# Altium PCB SIM_4G_EC200S.PcbDoc
Units mm, origin at the board's own origin, x right, y up, seen from the top; angles counter-clockwise.
Board outline 50 x 50 mm, 2 copper layers (Top Layer, Bottom Layer); 41 components, 29 nets, 241 pads, 9 vias.
Unrouted connection lines stored in the file: 1.
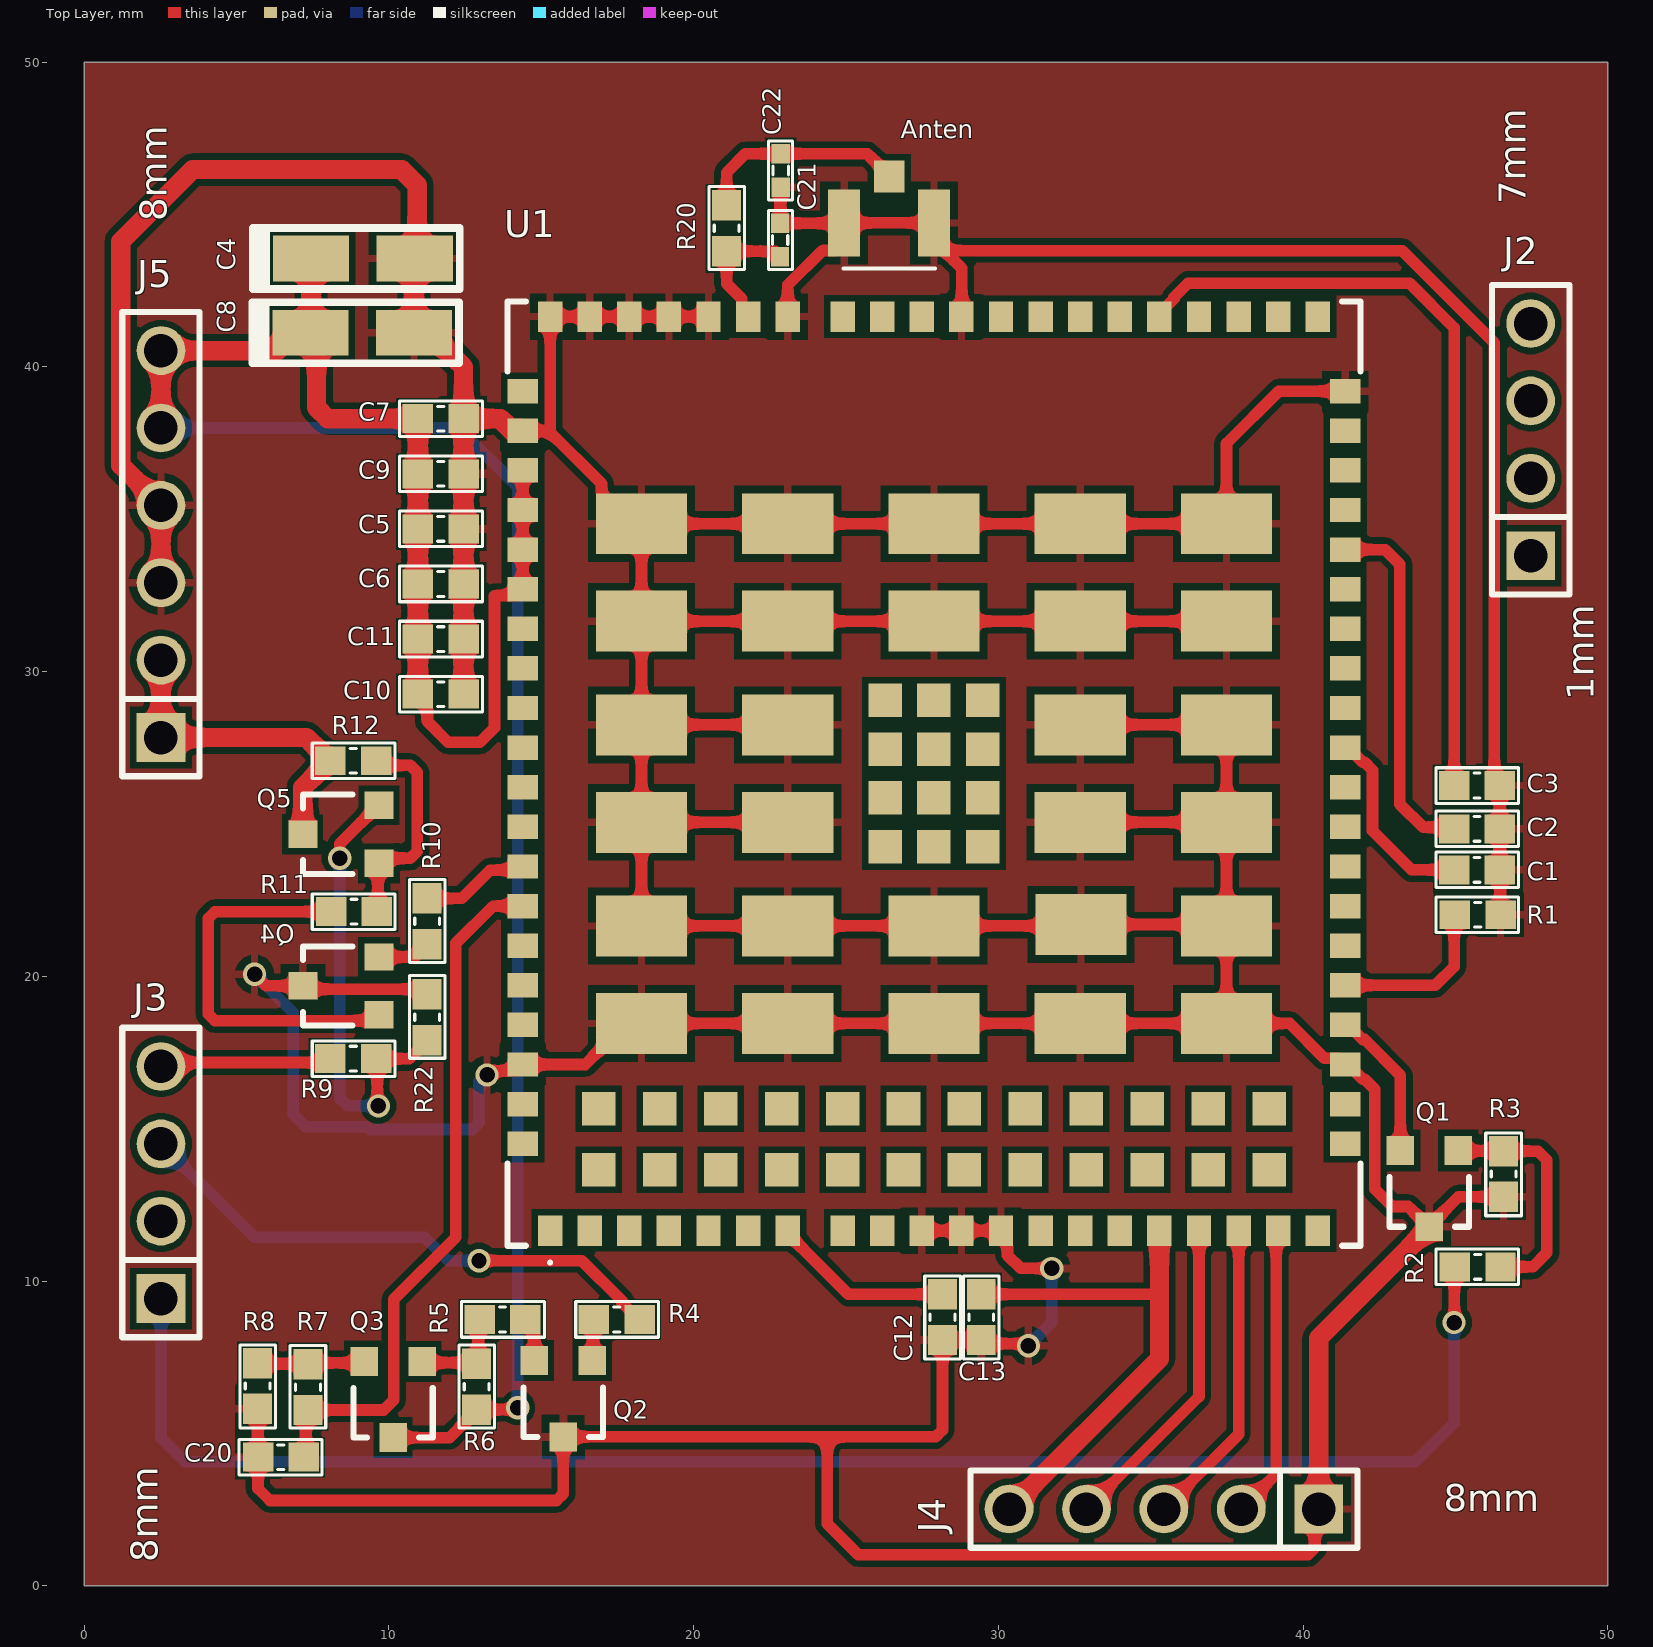
[diagram p0: Top Layer view]
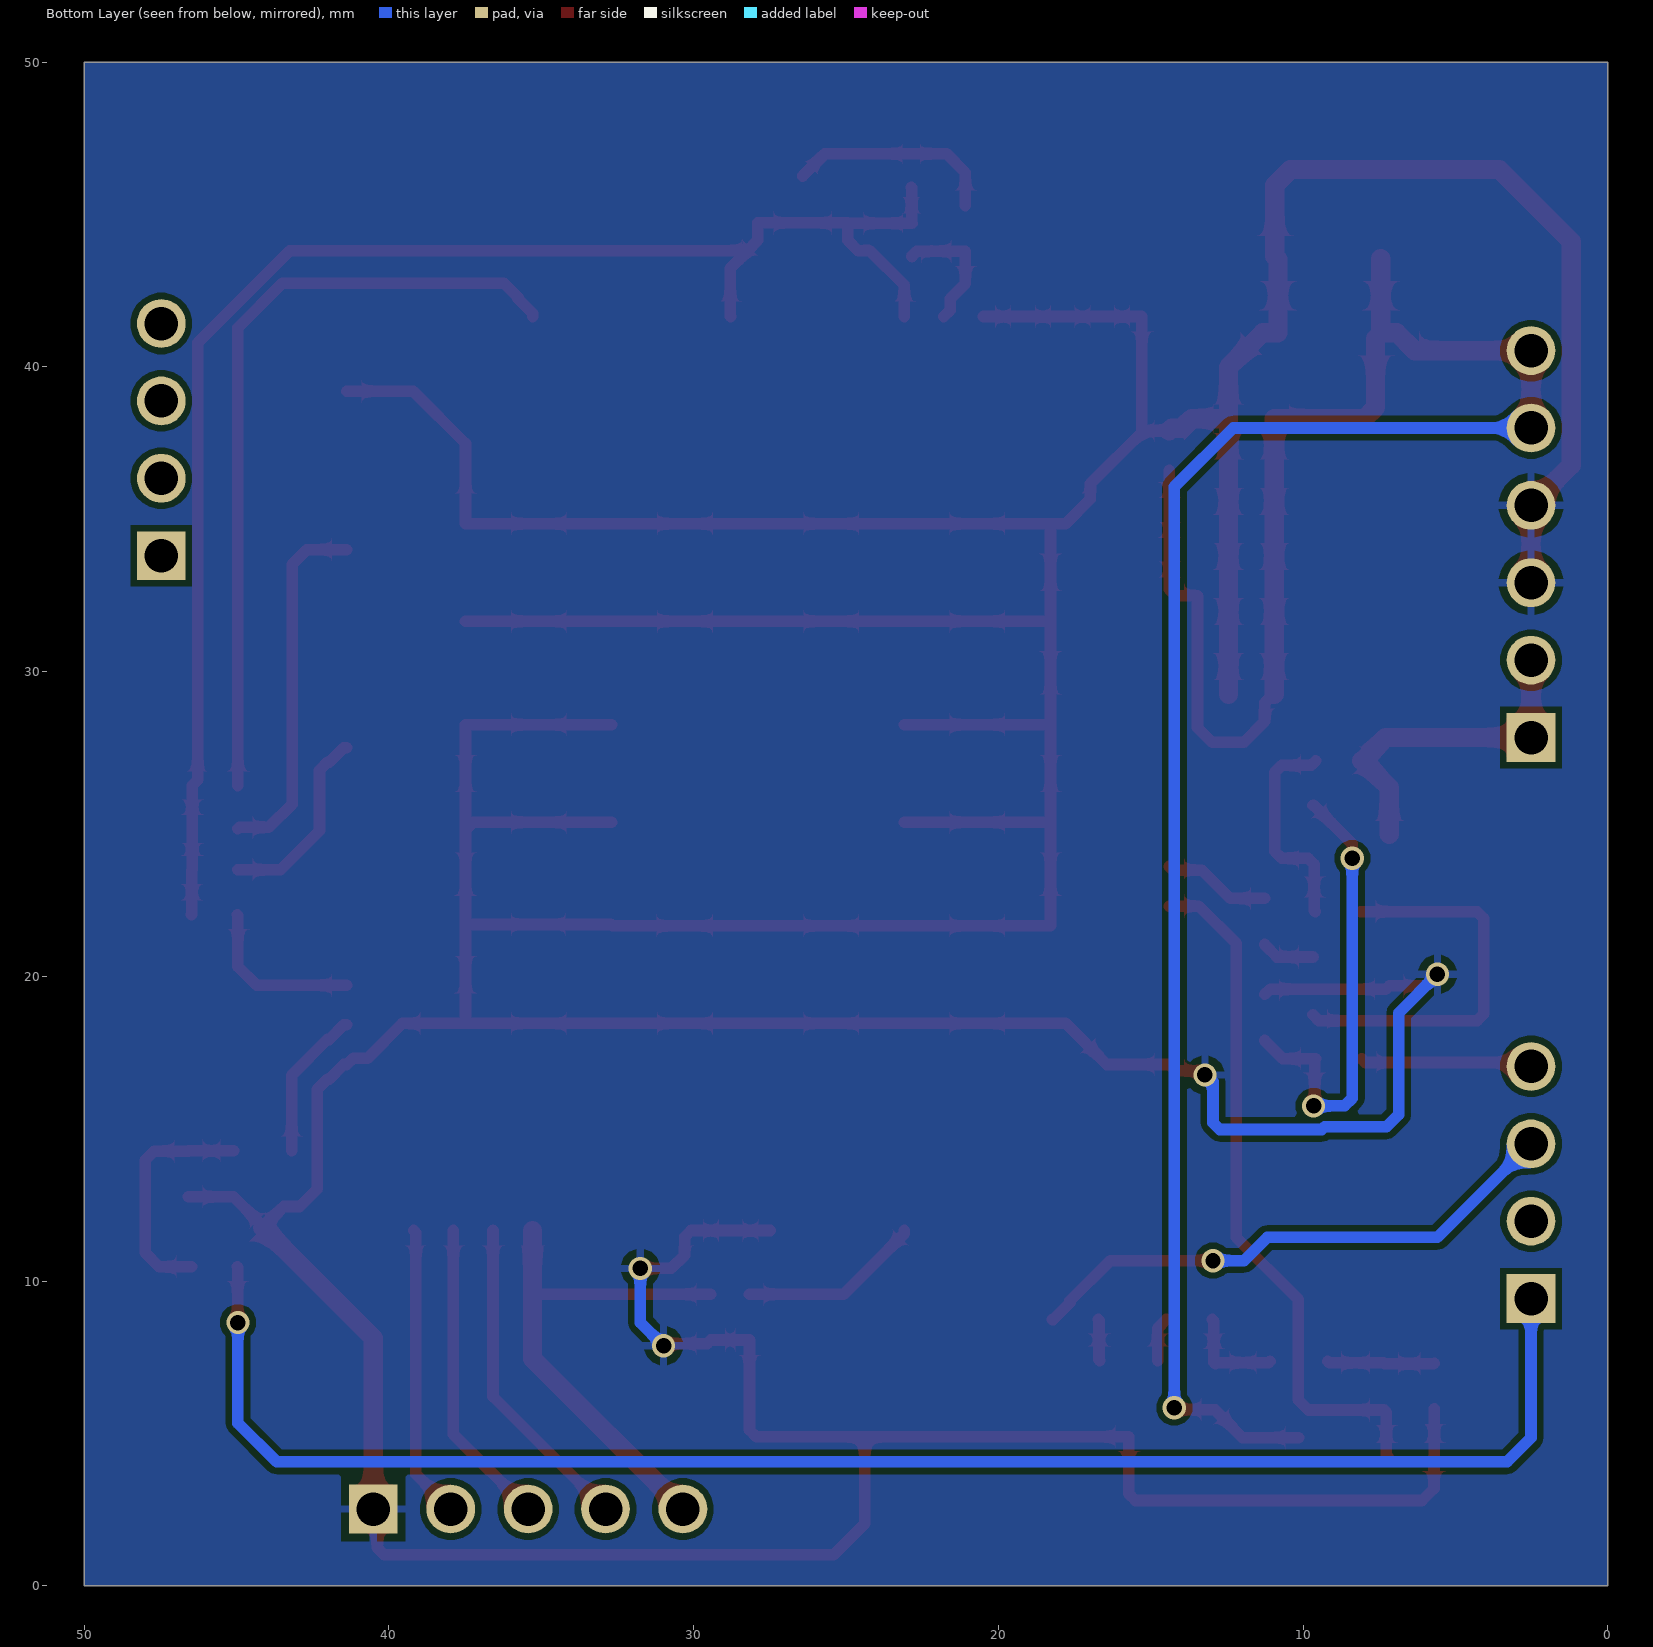
[diagram p1: Bottom Layer view, seen from below]
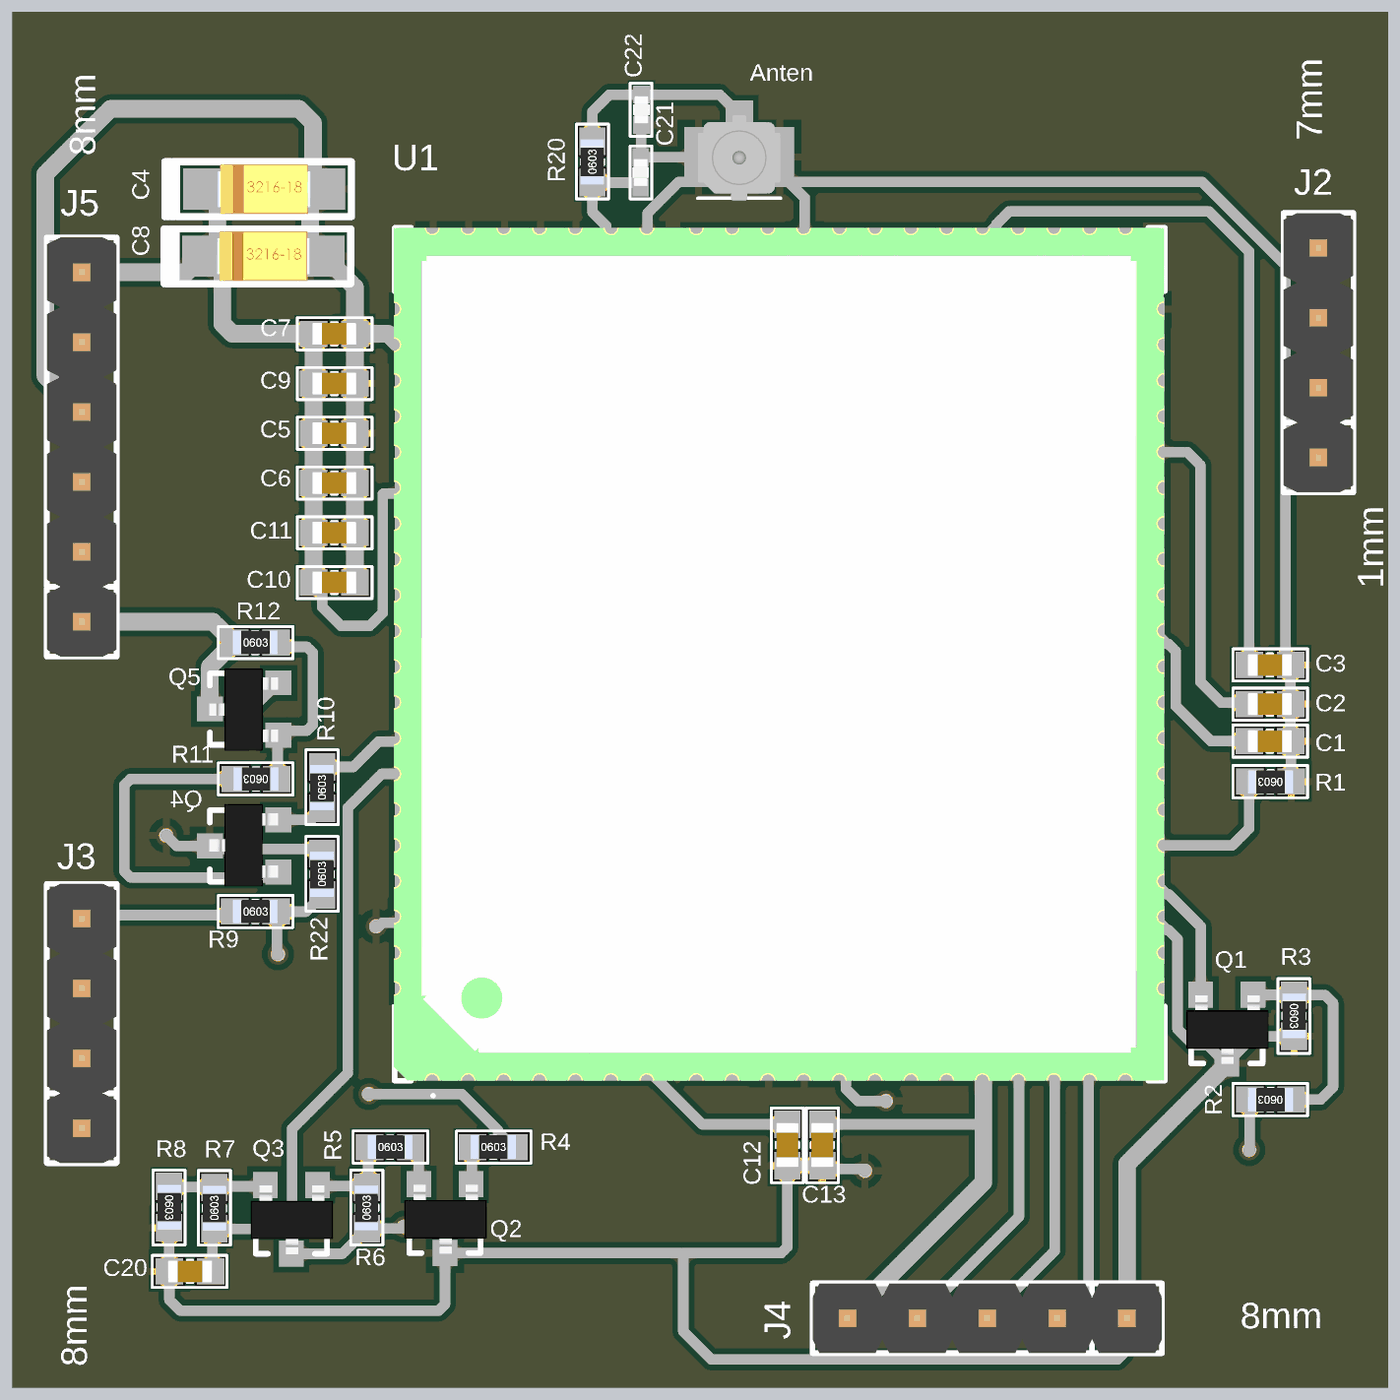
[diagram p2: 3D render of the assembled board from above, using the file's embedded part models]

## Layer stack, top to bottom
Top Solder: solder mask 0.0102, Solder Resist, Dk 3.5
Top Layer: signal copper 0.0356
Dielectric 1: dielectric 0.32, FR-4, Dk 4.8
Bottom Layer: signal copper 0.0356
Bottom Solder: solder mask 0.0102, Solder Resist, Dk 3.5

## Board outline
0,0 50,0 50,50 0,50

## Design rules (kind name [scope] priority, off if disabled: settings)
Clearance Clearance_1 [InPolygon] p1: gap=0.203 ignorepadtopadclearanceinfootprint=FALSE
Clearance [All] p2: gap=0.203 ignorepadtopadclearanceinfootprint=FALSE
PolygonConnect [All] p1: connectstyle=Relief reliefconductorwidth=0.254 reliefentries=4 polygonreliefangle="90 Angle" airgapwidth=0.254
RoutingVias [All] p1: holewidth=0.711 width=1.27 viastyle="Through Hole" minholewidth=0.254 minwidth=0.381 maxholewidth=0.508 maxwidth=0.762
SolderMaskExpansion [IsVia] p1: expansion=0.102 istentingtop=TRUE
Width [All] p1: maxlimit=1.016 minlimit=0.381 preferedwidth=0.635
30 further rules are at their usual default settings.

## Classes and differential pairs
component class SIM4G_EC200S: 60

## Components (designator, comment, footprint, x,y, rotation, side; value= is the part's Value field where it differs from the comment)
Anten "1909763" TE_1909763-1 26.416,44.729 r180 top
C1 "330/50V/0603" "tu 0603" 45.708,23.495 r0 top
C2 "330/50V/0603" "tu 0603" 45.708,24.841 r0 top
C3 "330/50V/0603" "tu 0603" 45.708,26.264 r0 top
C4 "100uF/0603" "tu tantalum smd3216" 9.144,43.561 r0 top
C5 "10pF/25V/0603" "tu 0603" 11.697,34.686 r0 top
C6 "33pF/25V/0603" "tu 0603" 11.697,32.878 r0 top
C7 "104/50V/0603" "tu 0603" 11.697,38.303 r0 top
C8 "100uF/0603" "tu tantalum smd3216" 9.12,41.123 r0 top
C9 "10pF/25V/0603" "tu 0603" 11.697,36.495 r0 top
C10 "33pF/25V/0603" "tu 0603" 11.697,29.261 r0 top
C11 "104/50V/0603" "tu 0603" 11.697,31.069 r0 top
C12 "104/50V/0603" "tu 0603" 28.169,8.814 r270 top
C13 "104/50V/0603" "tu 0603" 29.439,8.814 r270 top
C20 "100pF/50V/0603" "tu 0603" 6.452,4.216 r180 top
C21 "220nF/0402" "tu 0402" 22.835,44.17 r270 top
C22 "220nF/0402" "tu 0402" 22.86,46.448 r90 top
J2 "JP 1x4 2.54" "JP 1x4 DT" 47.473,33.807 r90 top
J3 "JP 1x4 2.54" "JP 1x4 DT" 2.515,9.423 r90 top
J4 "JP 1x5 2.54" "JP 1x5 DT" 40.513,2.515 r180 top
J5 "JP 1x6 2.54" "JP 1x6 DT" 2.515,27.838 r90 top
Q1 "HF" SOT23#1 44.145,13.03 r180 top value=C9014
Q2 "HF" SOT23#1 15.719,6.136 r180 top value=C9014
Q3 "BA" SOT23#1 10.135,6.11 r180 top
Q4 "HF" SOT23#2 8.422,19.685 r270 top value=C9014
Q5 "BA" SOT23#1 8.422,24.663 r90 top
R1 "4701/0603/1%" "tro smd 0603" 45.733,22.022 r180 top
R2 "1001/0603" "tro smd 0603" 45.732,10.465 r180 top
R3 "1002/0603" "tro smd 0603" 46.584,13.513 r270 top
R4 "1001/0603" "tro smd 0603" 17.475,8.738 r0 top
R5 "470R/0603" "tro smd 0603" 13.728,8.738 r0 top
R6 "1002/0603" "tro smd 0603" 12.878,6.528 r90 top
R7 "100R/0603" "tro smd 0603" 7.341,6.516 r90 top
R8 "5101/0603" "tro smd 0603" 5.69,6.553 r270 top
R9 "100R/0603" "tro smd 0603" 8.826,17.297 r0 top
R10 "1001/0603" "tro smd 0603" 11.252,21.807 r90 top
R11 "470R/0603" "tro smd 0603" 8.851,22.123 r180 top
R12 "1002/0603" "tro smd 0603" 8.826,27.076 r0 top
R20 "0R0/0402" "tro smd 0603" 21.082,44.552 r90 top
R22 "5101/0603" "tro smd 0603" 11.252,18.657 r90 top
U1 "EC200S" EC200U 27.887,26.656 r90 top

## Footprints (in the part's own frame and the unit in brackets; to place one, negate y for a bottom-side part, rotate by r counter-clockwise, add the part's x,y. Pads: shape width x height; smd on the part's side, far side on the other; paste and mask are expansions set on the pad)
EC200U [mm]
  rect 1x0.8 smd: 1(-15,12.6) 2(-15,11.3) 3(-15,10) 4(-15,8.7) 5(-15,7.4) 6(-15,6.1) 7(-15,4.8) 8(-15,0.4) 9(-15,-0.9) 10(-15,-2.2) 11(-15,-3.5) 12(-15,-4.8) 13(-15,-6.1) 14(-15,-7.4) 15(-15,-8.7) 16(-15,-10) 17(-15,-11.3) 18(-15,-12.6) 37(15,-12.6) 38(15,-11.3) 39(15,-10) 40(15,-8.7) 41(15,-7.4) 42(15,-6.1) 43(15,-4.8) 44(15,-3.5) 45(15,-2.2) 46(15,-0.9) 47(15,0.4) 48(15,4.8) 49(15,6.1) 50(15,7.4) 51(15,8.7) 52(15,10) 53(15,11.3) 54(15,12.6) 141(-15,3) 142(-15,1.7) 143(15,1.7) 144(15,3)
  rect 0.8x1 smd: 19(-9.55,-13.5) 20(-8.25,-13.5) 21(-6.95,-13.5) 22(-5.65,-13.5) 23(-4.35,-13.5) 24(-3.05,-13.5) 25(-1.75,-13.5) 26(-0.45,-13.5) 27(0.85,-13.5) 28(2.15,-13.5) 29(3.45,-13.5) 30(4.75,-13.5) 31(6.05,-13.5) 32(7.35,-13.5) 33(8.65,-13.5) 34(9.95,-13.5) 35(11.25,-13.5) 36(12.55,-13.5) 55(12.55,13.5) 56(11.25,13.5) 57(9.95,13.5) 58(8.65,13.5) 59(7.35,13.5) 60(6.05,13.5) 61(4.75,13.5) 62(3.45,13.5) 63(2.15,13.5) 64(0.85,13.5) 65(-0.45,13.5) 66(-1.75,13.5) 67(-3.05,13.5) 68(-4.35,13.5) 69(-5.65,13.5) 70(-6.95,13.5) 71(-8.25,13.5) 72(-9.55,13.5) 113(-10.85,13.5) 114(-12.15,13.5) 115(-10.85,-13.5) 116(-12.15,-13.5)
  rect 1.1x1.1 smd: 73(2.4,1.6) 74(2.4,0) 75(2.4,-1.6) 76(0.8,1.6) 77(0.8,0) 78(0.8,-1.6) 79(-0.8,1.6) 80(-0.8,0) 81(-0.8,-1.6) 82(-2.4,1.6) 83(-2.4,0) 84(-2.4,-1.6) 117(-11,11) 118(-11,9) 119(-11,7) 120(-11,5) 121(-11,3) 122(-11,1) 123(-11,-1) 124(-11,-3) 125(-11,-5) 126(-11,-7) 127(-11,-9) 128(-11,-11) 129(-13,11) 130(-13,9) 131(-13,7) 132(-13,5) 133(-13,3) 134(-13,1) 135(-13,-1) 136(-13,-3) 137(-13,-5) 138(-13,-7) 139(-13,-9) 140(-13,-11)
  rect 2x3 smd: 85(8.2,9.6) 86(8.2,4.8) 87(8.2,0) 88(8.2,-4.8) 89(8.2,-9.6) 90(5,9.6) 91(5,4.8) 92(5,0) 93(5,-4.8) 94(5,-9.6) 95(1.6,9.6) 96(1.6,4.8) 97(1.6,-4.8) 98(1.6,-9.6) 99(-1.6,9.6) 100(-1.6,4.8) 101(-1.6,-4.8) 102(-1.6,-9.6) 103(-5,9.6) 104(-5,4.8) 105(-5,0) 106(-4.953,-4.826) 107(-5,-9.6) 108(-8.2,9.6) 109(-8.2,4.8) 110(-8.2,0) 111(-8.2,-4.8) 112(-8.2,-9.6)
  silkscreen extent -16.1,-14 15.5,14, body extent -15.5,-13.97 15.5,14.03, height 2
"JP 1x4 DT" [mm] "4 pins, 1 row, straight, gold plating"
  rect 1.6x1.6 hole 1.1: 1(0,0)
  round 1.6 hole 1.1: 2(2.54,0) 3(5.08,0) 4(7.62,0)
  silkscreen extent -1.27,-1.27 8.89,1.27, body extent -1.27,-1.27 8.89,1.27, height 8.54
"JP 1x5 DT" [mm] "5 pins, 1 row, straight, gold plating"
  rect 1.6x1.6 hole 1.1: 1(0,0)
  round 1.6 hole 1.1: 2(2.54,0) 3(5.08,0) 4(7.62,0) 5(10.16,0)
  silkscreen extent -1.27,-1.27 11.43,1.27, body extent -1.27,-1.27 11.43,1.27, height 8.54
"JP 1x6 DT" [mm] "6 pins, 1 row, straight, gold plating"
  rect 1.6x1.6 hole 1.1: 1(0,0)
  round 1.6 hole 1.1: 2(2.54,0) 3(5.08,0) 4(7.62,0) 5(10.16,0) 6(12.7,0)
  silkscreen extent -1.27,-1.27 13.97,1.27, body extent -1.27,-1.27 13.97,1.27, height 8.54
SOT23#1 [mm] "SOT23"
  rect 0.9x0.95 smd: 1(-0.95,-1.25) 2(0,1.25)
  rect 0.9x0.95 smd mask+0: 3(0.95,-1.25)
  silkscreen extent -1.3,-0.38 1.3,1.25, body extent -1.52,-1.23 1.48,1.27, height 1.06
SOT23#2 [mm] "SOT23"
  rect 0.9x0.95 smd: 1(-0.95,1.25) 2(0,-1.25)
  rect 0.9x0.95 smd mask+0: 3(0.95,1.25)
  silkscreen extent -1.3,-1.25 1.3,0.38, body extent -1.52,-1.27 1.48,1.23, height 1.06
TE_1909763-1 [mm]
  rect 1x1.05 smd: 1(0,-1.525)
  rect 1.05x2.2 smd: 2(-1.475,0) 3(1.475,0)
  silkscreen extent -1.5,1.5 1.5,1.5, body extent -1.5,-1.53 1.5,1.58, height 1.27
"tro smd 0603" [mm] "Chip Capacitor, 2-Leads, Body 1,60x0,80mm, IPC Medium Density"
  rect 1x0.95 smd mask+0.076: 1(-0.75,0) 2(0.75,0)
  silkscreen extent -1.35,-0.58 1.37,0.58, body extent -0.82,-0.42 0.82,0.43, height 0.44
"tu 0402" [mm]
  rect 0.65x0.6 smd: 1(-0.55,0) 2(0.55,0)
  silkscreen extent -0.97,-0.38 0.97,0.41, body extent -0.5,-0.27 0.5,0.26, height 0.35
"tu 0603" [mm] "Chip Capacitor, 2-Leads, Body 1,60x0,80mm, IPC Medium Density"
  rect 1x0.95 smd mask+0.076: 1(-0.75,0) 2(0.75,0)
  silkscreen extent -1.35,-0.58 1.37,0.58, body extent -0.8,-0.4 0.8,0.4, height 0.9
"tu tantalum smd3216" [mm]
  rect 2.5x1.5 smd: 1(-1.7,0) 2(1.7,0)
  silkscreen extent -3.61,-1 3.17,1, body extent -1.7,-0.9 1.7,0.9, height 1.69

## Part data
Anten: library part Antenna, "VAO ITEM, MINI RF HEADER", Package=None, Availability=Unavailable, MP=1909763-1, Price=None
C1 C2 C3 C5 C6 C7 C9 C10 C11 C12 C13 C20: library part "Tu 0603 563 16V 10%", "Dán", Chung_Loai=Dán, Don_Vi=Con, Ma_Hang=MH004573, So_Chan=2, Ten_Linh_Kien="Tụ 0603 563-56nF 10% 16V"
C4 C8: library part "Tu tantalum 10uF 16V SMD3216", "Dán", Chung_Loai=Dán, Don_Vi=Con, Ma_Hang=MH001954, So_Chan=2, Ten_Linh_Kien="Tụ tantalum 106C-10uF 16V SMD3216"
C21 C22: library part "Tu 0402 220nF 6.3V 20%", "Dán", Chung_Loai=Dán, Don_Vi=Con, Ma_Hang=MH008102, So_Chan=2, Ten_Linh_Kien="Tụ 0402 220nF 6.3V 20%"
J2 J3: library part "JP 1x4 2.54 Duc Thang", "Cắm", Chung_Loai=Cắm, Don_Vi=Con, Ma_Hang=MH000903, Ten_Linh_Kien="Jump Đơn Đực 2.54MM 1x40P Thẳng 11MM"
J4: library part "JP 1x5 2.54 Duc Thang", "Cắm", Chung_Loai=Cắm, Don_Vi=Con, Ma_Hang=MH000903, Ten_Linh_Kien="Jump Đơn Đực 2.54MM 1x40P Thẳng 11MM"
J5: library part "JP 1x6 2.54 Duc Thang", "Cắm", Chung_Loai=Cắm, Don_Vi=Con, Ma_Hang=MH000903, Ten_Linh_Kien="Jump Đơn Đực 2.54MM 1x40P Thẳng 11MM"
Q1 Q2 Q4: library part "C1815 HF SMD", "NPN transistor"
Q3: library part "A1015 BA SMD", "PMBT3906,235 / MMBT4403/SOT_0"
Q5: library part "A1015 BA SMD", "PNP 600mW, ECB"
R1 R2 R3 R4 R5 R6 R7 R8 R9 R10 R11 R12 R20 R22: library part "Tro 0603 5% 510R", "Dán", Chung_Loai=Dán, Don_Vi=Con, Ma_Hang=MH007667, So_Chan=2, Ten_Linh_Kien="Trở 0603 5% 510R"
U1: "GMS/4G-LTE"

## Via types
v1: diameter 0.762, hole 0.508, Top Layer to Bottom Layer, tented both sides, 9 vias

## Nets (pads, with @x,y where several pads share a name; then routed paths per layer and width w, separated by ;. In a path a pad name is that pad's centre, name@x,y a point inside that pad or via, vN(x,y) a via of type N, cw(c..) or ccw(c..) an arc to the next point about the centre after c; other vN are vias at no path point)
+3.3V_MAIN: J5.1 J5.2 Q5.2 R12.1 | length 11.2
  Top Layer w0.635: J5.2 J5.1 7.289,27.838 R12.1@8.051,27.076 ; Q5.2 7.172,26.197 R12.1@8.051,27.076 ; R12.1 R12.1@8.051,27.076
+3.8V_MAIN: C4.1 C5.1 C6.1 C7.1 C8.1 C9.1 C10.1 C11.1 J5.5 J5.6 Q3.2 R6.1 U1.57 U1.58 U1.59 U1.60 | length 85.4
  Top Layer w0.381: Q3.2 11.985,4.86 12.878,5.753 R6.1 14.16,5.778 v1(14.224,5.842) ; C10.1 10.972,29.261 11.257,28.976 11.257,28.367 11.938,27.686 12.985,27.686 13.462,28.163 13.462,32.483 13.476,32.496 14.178,32.496 U1.60 U1.59 U1.58 U1.57
  Top Layer w0.635: J5.5 J5.6 6.336,40.538 6.92,41.123 C8.1 ; C4.1 7.444,41.146 C8.1 ; C10.1 C11.1 C6.1 C5.1 C9.1 C7.1 7.992,38.303 7.62,38.675 7.62,40.923 C8.1
  Bottom Layer w0.381: J5.5 12.294,37.998 14.224,36.068 v1(14.224,5.842)
ANT_MAIN: C21.2 R20.1 U1.49 | length 4.3
  Top Layer w0.381: U1.49 21.578,41.866 21.578,42.234 21.082,42.73 R20.1 22.678,43.802 22.835,43.645 C21.2
GND: Anten.2 Anten.3 C1.2 C2.2 C3.2 C4.2 C5.2 C6.2 C7.2 C8.2 C9.2 C10.2 C11.2 C12.2 C13.2 C20.2 C21.1 C22.1 J4.1 J5.3 J5.4 Q1.2 Q2.2 Q4.2 R1.1 R3.2 R8.2 R22.2 U1.8 U1.9 U1.10 U1.19 U1.36 U1.46 U1.48 U1.50 U1.51 U1.52 U1.53 U1.54 U1.56 U1.72 U1.85 U1.86 U1.87 U1.88 U1.89 U1.90 U1.91 U1.92 U1.93 U1.94 U1.95 U1.96 U1.97 U1.98 U1.99 U1.100 U1.101 U1.102 U1.103 U1.104 U1.105 U1.106 U1.107 U1.108 U1.109 U1.110 U1.111 U1.112 | length 347
  Top Layer w0.381: v1(5.588,20.066) 5.969,19.685 Q4.2 7.278,19.579 11.081,19.579 R22.2 ; R8.2 5.696,5.797 5.696,4.222 C20.2 5.702,3.188 6.096,2.794 15.496,2.794 15.719,3.017 Q2.2 24.384,4.886 ; v1(13.221,16.764) 13.324,16.764 13.456,16.896 14.178,16.896 U1.72 16.437,17.106 17.787,18.456 U1.108 U1.109 U1.110 U1.111 U1.112 ; U1.56 15.237,37.906 ; U1.50 U1.51 U1.52 U1.53 U1.54 15.287,37.956 15.237,37.906 ; C22.1 22.847,45.885 22.847,44.732 C21.1 24.931,44.72 Anten.3 ; U1.100 U1.99 ; U1.96 U1.95 ; U1.48 23.087,42.691 24.217,43.82 24.606,43.82 24.941,44.154 Anten.3 ; U1.8 U1.9 U1.10 30.297,11.446 30.297,10.851 30.734,10.414 v1(31.75,10.414) ; U1.46 28.8,41.669 28.8,43.245 Anten.2@28.226,43.82 ; v1(30.988,7.874) 30.915,7.947 29.556,7.947 C13.2 C12.2 28.169,5.109 27.945,4.886 24.384,4.886 ; U1.101 37.231,25.056 U1.102@37.487,24.8 ; U1.97 U1.98 U1.102 U1.102@37.487,24.8 ; U1.94 U1.93 U1.92 U1.91 U1.90 ; J4.1 40.386,2.388 40.386,1.239 40.163,1.016 25.4,1.016 24.384,2.032 24.384,4.886 ; U1.36 39.206,39.206 37.487,37.487 U1.89 U1.88 U1.87 U1.86 U1.85 ; Q1.2@44.145,11.755 Q1.2 Q1.2@44.145,11.805 ; R1.1 46.471,22.034 46.471,23.482 C1.2 C2.2 C3.2 46.279,26.443 46.279,40.797 43.256,43.82 Anten.2@28.226,43.82 ; R3.2 45.103,12.763 Q1.2@44.145,11.805 ; 15.237,37.906 16.978,36.165 16.978,35.665 17.787,34.856 U1.85 ; U1.99 U1.95 ; U1.99 U1.103 U1.104 U1.105 32.666,21.656 U1.106 37.44,21.703 U1.107 ; U1.95 U1.90 ; U1.90 U1.85 ; Anten.3 Anten.2 27.891,44.154 Anten.2@28.226,43.82 ; U1.112 U1.107 ; U1.112 39.559,18.456 40.699,17.316 41.178,17.316 U1.19 41.487,17.106 41.966,16.627 42.023,16.627 42.351,16.299 42.351,13.021 42.926,12.446 43.454,12.446 43.836,12.065 43.886,12.065 Q1.2@44.145,11.805 ; U1.107 U1.102@37.487,24.8
  Top Layer w0.635: J5.3 J5.4 1.194,36.779 1.194,44.12 3.556,46.482 10.414,46.482 10.922,45.974 10.922,43.639 C4.2 10.82,43.537 C8.2 11.32,41.123 12.447,39.996 C7.2 ; C10.2 C11.2 C6.2 C5.2 C9.2 C7.2 ; U1.56 14.305,37.989 13.969,37.989 13.654,38.303 C7.2 ; J4.1 40.513,8.123 Q1.2@44.145,11.755
  Bottom Layer w0.381: v1(5.588,20.066) 6.858,18.796 6.858,15.463 7.259,15.062 9.292,15.062 9.381,14.973 12.731,14.973 12.954,15.196 12.954,16.541 13.177,16.764 v1(13.221,16.764) ; v1(30.988,7.874) 31.75,8.636 v1(31.75,10.414)
NetAnten_1: Anten.1 C22.2 R20.2 | length 7
  Top Layer w0.381: R20.2 21.082,46.382 21.698,46.998 C22.2 25.698,46.998 26.416,46.279 Anten.1
NetC1_1: C1.1 U1.27 | length 6.4
  Top Layer w0.381: U1.27 41.487,27.506 41.966,27.027 42.023,27.027 42.281,26.769 42.281,24.775 43.561,23.495 C1.1
NetC2_1: C2.1 U1.32 | length 12
  Top Layer w0.381: U1.32 42.702,34.006 43.18,33.528 43.18,25.654 43.942,24.892 44.907,24.892 C2.1
NetC3_1: C3.1 U1.41 | length 25.8
  Top Layer w0.381: U1.41 35.287,41.756 35.766,42.235 35.766,42.292 36.225,42.75 43.5,42.75 44.958,41.292 C3.1
NetQ1_1: Q1.1 R2.1 R3.1 | length 7.8
  Top Layer w0.381: Q1.1 45.104,14.272 46.575,14.272 R3.1 47.713,14.263 48.006,13.97 48.006,10.922 47.549,10.465 R2.1
NetQ2_1: Q2.1 R4.1 | length 1.4
  Top Layer w0.381: Q2.1 16.697,7.413 16.697,8.71 R4.1
NetQ2_3: Q2.3 R5.2 | length 1.5
  Top Layer w0.381: R5.2 14.485,8.738 14.769,8.453 Q2.3
NetQ3_1: Q3.1 R5.1 R6.2 | length 3.3
  Top Layer w0.381: Q3.1 11.126,7.319 12.837,7.319 R6.2 12.928,7.328 12.928,8.688 R5.1
NetQ3_3: Q3.3 R7.2 R8.1 | length 3.5
  Top Layer w0.381: R8.1 5.708,7.285 7.322,7.285 7.35,7.313 9.137,7.313 Q3.3
NetQ4_1: Q4.1 R10.1 | length 1.8
  Top Layer w0.381: Q4.1 10.856,20.635 11.252,21.032 R10.1
NetQ4_3: Q4.3 R11.2 | length 13
  Top Layer w0.381: R11.2 4.287,22.123 4.064,21.9 4.064,18.765 4.287,18.542 9.479,18.542 Q4.3
NetQ5_1: Q5.1 R11.1 R12.2 | length 7.1
  Top Layer w0.381: R12.2 9.728,26.924 10.699,26.924 10.922,26.701 10.922,24.099 10.699,23.876 9.834,23.876 Q5.1 9.636,23.678 9.636,22.159 R11.1
NetQ5_3: Q5.3 R9.2 R22.1 | length 15.1
  Top Layer w0.381: v1(8.382,23.876) 8.382,24.349 9.647,25.613 Q5.3 ; v1(9.652,15.748) 9.614,15.786 9.614,17.259 R9.2 10.668,17.297 11.252,17.882 R22.1
  Bottom Layer w0.381: v1(8.382,23.876) 8.382,16.002 8.636,15.748 v1(9.652,15.748)
NetR1_2: R1.2 U1.21 | length 5.5
  Top Layer w0.381: U1.21 44.344,19.706 44.958,20.32 44.958,21.996 R1.2
RESET_MODULE_3G: J3.1 R2.2 | length 53
  Top Layer w0.381: v1(44.958,8.636) 44.97,8.648 44.97,10.453 R2.2
  Bottom Layer w0.381: J3.1 2.515,4.851 3.302,4.064 43.688,4.064 44.958,5.334 v1(44.958,8.636)
RESET_N: Q1.3 U1.20 | length 5
  Top Layer w0.381: U1.20 41.487,18.406 41.966,17.927 42.023,17.927 43.195,16.755 Q1.3
RX_MCU: J3.4 R9.1 | length 5.7
  Top Layer w0.381: J3.4 2.642,17.17 7.949,17.17 R9.1
RXD_3G: C20.1 R7.1 U1.68 | length 23.1
  Top Layer w0.381: C20.1 7.271,4.286 7.271,5.696 R7.1 9.83,5.766 10.16,6.096 10.16,9.398 12.192,11.43 12.192,21.082 13.416,22.306 U1.68
TX_MCU: J3.3 R4.2 | length 18.1
  Top Layer w0.381: v1(12.954,10.668) 16.327,10.668 17.646,9.348 17.646,9.292 18.2,8.738 R4.2
  Bottom Layer w0.381: J3.3 5.588,11.43 11.176,11.43 11.938,10.668 v1(12.954,10.668)
TXD_3G: R10.2 U1.67 | length 3.6
  Top Layer w0.381: R10.2 12.387,22.557 13.316,23.485 14.267,23.485 U1.67
USIM_CLK: J4.3 U1.16 | length 10.2
  Top Layer w0.381: J4.3 37.887,4.969 U1.16
USIM_DATA: J4.4 U1.15 | length 10.7
  Top Layer w0.381: J4.4 36.587,6.209 U1.15
USIM_RST: J4.2 U1.17 | length 9.6
  Top Layer w0.381: J4.2 39.116,3.658 39.116,11.585 U1.17
USIM_VDD: C13.1 J4.5 U1.14 | length 17
  Top Layer w0.381: C13.1 35.276,9.564 35.287,9.553
  Top Layer w0.635: J4.5 35.287,7.449 35.287,9.553 U1.14
VDD_EXT: C12.1 U1.7 | length 6
  Top Layer w0.381: U1.7 23.087,11.556 25.08,9.564 C12.1
pads on no net: J2.1 J2.2 J2.3 J2.4 J3.2 U1.1 U1.2 U1.3 U1.4 U1.5 U1.6 U1.11 U1.12 U1.13 U1.18 U1.22 U1.23 U1.24 U1.25 U1.26 U1.28 U1.29 U1.30 U1.31 U1.33 U1.34 U1.35 U1.37 U1.38 U1.39 U1.40 U1.42 U1.43 U1.44 U1.45 U1.47 U1.55 U1.61 U1.62 U1.63 U1.64 U1.65 U1.66 U1.69 U1.70 U1.71 U1.73 U1.74 U1.75 U1.76 U1.77 U1.78 U1.79 U1.80 U1.81 U1.82 U1.83 U1.84 U1.113 U1.114 U1.115 U1.116 U1.117 U1.118 U1.119 U1.120 U1.121 U1.122 U1.123 U1.124 U1.125 U1.126 U1.127 U1.128 U1.129 U1.130 U1.131 U1.132 U1.133 U1.134 U1.135 U1.136 U1.137 U1.138 U1.139 U1.140 U1.141 U1.142 U1.143 U1.144

## Polygon pours and split planes (outlines as drawn)
GND on Bottom Layer "GND_L02_P001" (solid, pour order 1): 0,50 50,50 50,0 0,0
GND on Top Layer "GND_L01_P000" (solid, pour order 0): 50,50 50,0 0,0 0,50

## Silkscreen, mask and mechanical layers (free items; w line width, h text height)
Top Overlay:
  text "7mm" at 47.6,45.339 h1.52 r90
  text "8mm" at 3.006,44.78 h1.52 r90
  text "1mm" at 49.835,29.058 h1.52 r90
  text "8mm" at 44.628,2.15 h1.52
  text "8mm" at 2.701,0.762 h1.52 r90
Mechanical 13:
  the board outline again, w0.254